# EAGLE board MainBoard (EAGLE 9.1.3)
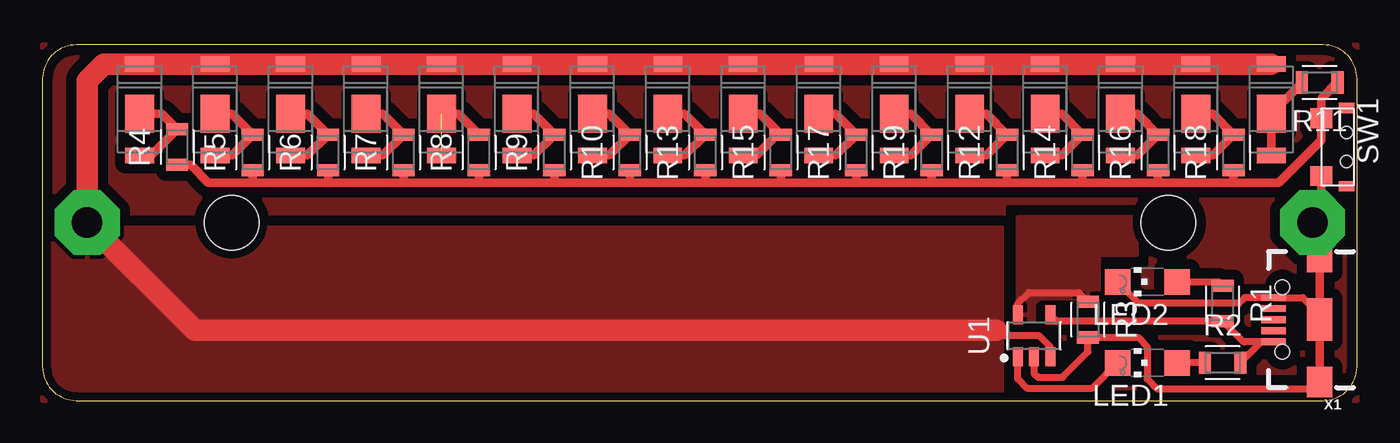
[diagram p0: board, top side]
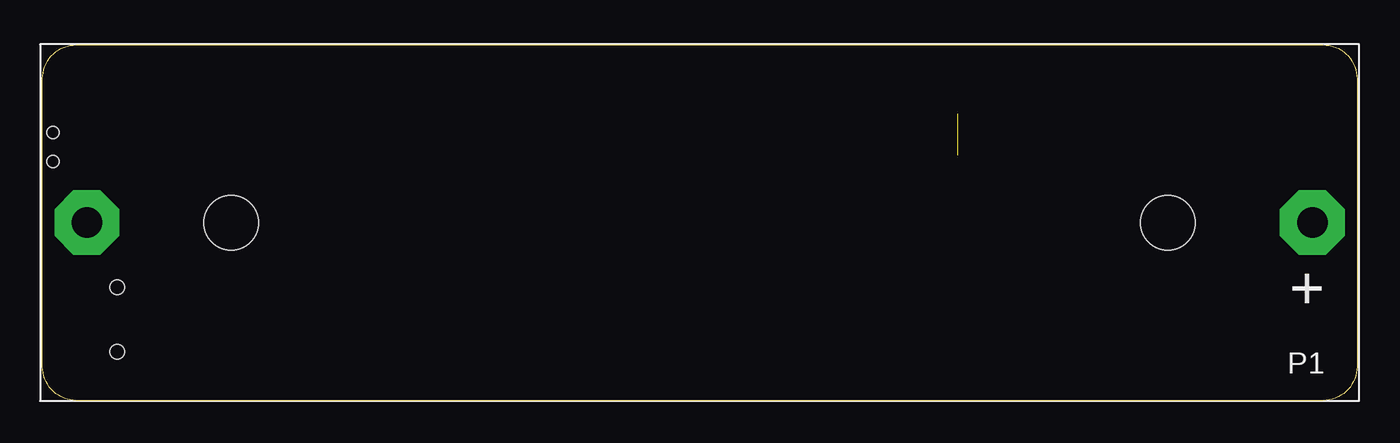
[diagram p1: board, bottom side, seen from below]

Size 77.45 x 20.94 mm. Coordinates in mm from the lower left corner, seen from the top.
Outline: 75.45,20.94 2,20.94 arc90 0,18.94 0,2 arc90 2,0 75.45,0 arc90 77.45,2 77.45,18.94 arc90 75.45,20.94
Copper layers (1*16): Top 0.035mm / dielectric 1.5mm / Bottom 0.035mm
Design rules "EagleDesignRules": minimum track width 0.25mm, minimum drill 0.3mm, track to track 0.25mm, track to pad 0.25mm, pad to pad 0.25mm, via to via 0.25mm, smd to smd 0.25mm, copper to edge 0.5mm, drill to drill 0.5mm, minimum pad ring 10mil, minimum via ring 8mil, stop-mask expansion 4mil, vias tented up to drill 0mil, thermal gap 0.25mm

## Footprints (pad centres in the part's own frame; a part is rotated, then mirrored left to right if it is on the bottom)
LED1206 = smd 1.5 x 1.5: A 0,-1.75; C 0,1.75
LED5730 = smd 0.9 x 1.7: A -2.708,-0.014; C 2.672,-0.014 | smd 2.25 x 1.7: A1 -0.263,-0.014
18650X1_HOLDER = drill 1.8 pad 3.81 octagon: + -36.1,0; - 36.1,0 | hole 3.2: -27.6,0; 27.6,0
RESC2012X50 = smd 0.712 x 1.312: 1 -1.05,0; 2 1.05,0
SW-2X4-SIDE = smd 1.15 x 1.3: 1 -1.7,-1.5; 2 1.7,-1.5 | smd 0.6 x 0.9: 3 2.3,0; 4 -2.3,0 | hole 0.7: -0.85,0; 0.85,0
SOT95P280X145-5 = smd 1.127 x 0.589: 1 -1.242,0.95; 2 -1.242,0; 3 -1.242,-0.95; 4 1.242,-0.95; 5 1.242,0.95
USB-B-MICRO-SMD = smd 1.45 x 0.4: D+ 2.725,0; D- 2.725,0.65; GND 2.725,-1.3; ID 2.725,-0.65; VBUS 2.725,1.3 | smd 1.5 x 1.8: SHIELD1 0,3.685; SHIELD2 0,-3.685 | smd 1.5 x 2.5: SHIELD3 0,0 | hole 0.85: 2.2,1.9; 2.2,-1.9

## Placement (x,y rotation side)
LED1  RED  [LED1206]  65.09,2.22 90 top
LED2  GREEN  [LED1206]  65.09,6.99 90 top
LED3  LED_5630  [LED5730]  5.71,17.14 90 top
LED4  LED_5630  [LED5730]  10.16,17.14 90 top
LED5  LED_5630  [LED5730]  14.6,17.14 90 top
LED6  LED_5630  [LED5730]  19.05,17.14 90 top
LED7  LED_5630  [LED5730]  23.49,17.14 90 top
LED8  LED_5630  [LED5730]  27.94,17.14 90 top
LED9  LED_5630  [LED5730]  32.38,17.14 90 top
LED10  LED_5630  [LED5730]  72.39,17.14 90 top
LED11  LED_5630  [LED5730]  54.61,17.14 90 top
LED12  LED_5630  [LED5730]  36.83,17.14 90 top
LED13  LED_5630  [LED5730]  59.05,17.14 90 top
LED14  LED_5630  [LED5730]  41.27,17.14 90 top
LED15  LED_5630  [LED5730]  63.5,17.14 90 top
LED16  LED_5630  [LED5730]  45.72,17.14 90 top
LED17  LED_5630  [LED5730]  67.94,17.14 90 top
LED18  LED_5630  [LED5730]  50.16,17.14 90 top
P1  BATTERY18650X1  [18650X1_HOLDER]  38.73,10.48 180 bottom
R1  2K  [RESC2012X50]  69.53,5.71 270 top
R2  2K  [RESC2012X50]  69.53,2.22 0 top
R3  2K7  [RESC2012X50]  61.59,4.76 270 top
R4  20R  [RESC2012X50]  7.94,14.92 90 top
R5  20R  [RESC2012X50]  12.38,14.61 90 top
R6  20R  [RESC2012X50]  16.83,14.61 90 top
R7  20R  [RESC2012X50]  21.27,14.61 90 top
R8  20R  [RESC2012X50]  25.72,14.61 90 top
R9  20R  [RESC2012X50]  30.16,14.61 90 top
R10  20R  [RESC2012X50]  34.61,14.61 90 top
R11  20R  [RESC2012X50]  75.25,18.73 180 top
R12  20R  [RESC2012X50]  56.83,14.61 90 top
R13  20R  [RESC2012X50]  39.05,14.61 90 top
R14  20R  [RESC2012X50]  61.28,14.61 90 top
R15  20R  [RESC2012X50]  43.5,14.61 90 top
R16  20R  [RESC2012X50]  65.72,14.61 90 top
R17  20R  [RESC2012X50]  47.94,14.61 90 top
R18  20R  [RESC2012X50]  70.17,14.61 90 top
R19  20R  [RESC2012X50]  52.39,14.61 90 top
SW1  BUTTON2X4-SIDE  [SW-2X4-SIDE]  76.83,14.92 270 top
U1  POWER-STC4054  [SOT95P280X145-5]  58.42,3.81 90 top
X1  USB-MINIMICROMICRO  [USB-B-MICRO-SMD]  75.25,4.76 180 top

## Library data of the parts
LED1-LED18 P1 R1-R19 SW1 U1 X1 = Flamberm

## Nets
+5V: R1.2 R2.2 U1.4 X1.VBUS
GND: LED2.C P1.- R3.2 SW1.2 U1.2 X1.GND X1.SHIELD1 X1.SHIELD2 X1.SHIELD3
N$1: LED1.C U1.1
N$2: LED1.A R2.1
N$3: LED2.A R1.1
N$4: LED3.C LED4.C LED5.C LED6.C LED7.C LED8.C LED9.C LED10.C LED11.C LED12.C LED13.C LED14.C LED15.C LED16.C LED17.C LED18.C P1.+ U1.3
N$5: R3.1 U1.5
N$6: LED3.A LED3.A1 R4.2
N$7: R4.1 R5.1 R6.1 R7.1 R8.1 R9.1 R10.1 R11.1 R12.1 R13.1 R14.1 R15.1 R16.1 R17.1 R18.1 R19.1 SW1.1
N$9: LED4.A LED4.A1 R5.2
N$10: LED11.A LED11.A1 R12.2
N$12: LED5.A LED5.A1 R6.2
N$13: LED12.A LED12.A1 R13.2
N$14: LED13.A LED13.A1 R14.2
N$15: LED6.A LED6.A1 R7.2
N$16: LED14.A LED14.A1 R15.2
N$17: LED15.A LED15.A1 R16.2
N$18: LED7.A LED7.A1 R8.2
N$19: LED16.A LED16.A1 R17.2
N$20: LED17.A LED17.A1 R18.2
N$21: LED8.A LED8.A1 R9.2
N$22: LED18.A LED18.A1 R19.2
N$24: LED9.A LED9.A1 R10.2
N$27: LED10.A LED10.A1 R11.2

## Tracks (layer width: path | path; a pad name or v marks a point on that pad's centre or on a via)
+5V
  Top 0.406: X1.VBUS 71.82,3.46 | 71.82,3.46 R2.2 | U1.4 59.76,4.67 R1.2 70.73,3.46 70.87,3.46 71.82,3.46
GND
  Top 0.406: LED2.C 64.61,5.71 70.48,5.71 70.83,6.06 X1.GND 74.27,6.06 75.25,5.08 | X1.SHIELD2 75.25,8.26 | 75.25,8.26 75.25,5.08 | 75.25,5.08 X1.SHIELD3 | X1.SHIELD1 74.87,0.7 65.65,0.7 65.09,1.27 65.09,3.17 64.55,3.71 R3.2 61.59,2.86 60.1,1.36 58.65,1.36 58.42,1.59 U1.2 | 75.25,10.06 75.25,9.84 75.25,8.57 75.25,8.26
  Top 0.508: SW1.2 75.33,10.98 P1.- 75.25,10.06 75.25,9.84 | X1.SHIELD1 X1.SHIELD3 75.25,8.57
N$1
  Top 0.406: LED1.C 61.82,0.7 58.03,0.7 57.47,1.27 U1.1
N$2
  Top 0.406: R2.1 LED1.A
N$3
  Top 0.406: LED2.A 69.31,6.99 R1.1
N$4
  Top 0.406: U1.3 59.37,3.18 58.74,3.81 56.52,3.81 56.2,4.13
  Top 0.508: LED12.C | LED14.C 41.59,19.82 | LED16.C 46.04,19.82 | LED18.C 50.16,19.82 | LED11.C | LED13.C 59.05,19.82 | LED15.C | LED17.C 67.63,19.82
  Top 1.27: 56.2,4.13 8.98,4.13 P1.+ 2.63,18.83 3.62,19.81 | 3.62,19.81 3.81,19.81 | 3.62,19.81 3.62,19.82 LED3.C LED4.C LED5.C LED6.C LED7.C LED8.C LED9.C LED12.C 41.59,19.82 46.04,19.82 50.16,19.82 LED11.C 56.83,19.82 59.05,19.82 LED15.C 67.63,19.82 LED10.C
  pour Top: 0,10.16 56.52,10.16 56.52,0 0,0 0,9.84 -0.32,10.16
N$5
  Top 0.406: U1.5 57.47,5.72 58.1,6.35 61.06,6.35 R3.1
  pour Top: 57.47,4.76 57.47,10.79 64.45,10.79 64.45,8.57 62.23,8.57 62.23,6.03 58.74,6.03 58.42,5.71 58.42,4.76
N$6
  Top 0.508: LED3.A 6.4,14.44 R4.2 7.03,16.88 LED3.A1
N$7
  Top 0.508: R4.1 8.73,13.87 9.77,12.83 12.38,12.83 | 12.38,12.83 16.83,12.83 | 16.83,12.83 21.27,12.83 | 21.27,12.83 25.72,12.83 | 25.72,12.83 30.16,12.83 | 30.16,12.83 34.61,12.83 | 34.61,12.83 39.05,12.83 | 39.05,12.83 43.5,12.83 | 43.5,12.83 47.94,12.83 | 47.94,12.83 52.39,12.83 | 52.39,12.83 56.83,12.83 | 56.83,12.83 61.28,12.83 | 61.28,12.83 65.72,12.83 | 65.72,12.83 70.17,12.83 | 70.17,12.83 72.84,12.83 75.33,15.33 SW1.1 75.33,17.77 R11.1 | R18.1 70.17,12.83 | R16.1 65.72,12.83 | R14.1 61.28,12.83 | R12.1 56.83,12.83 | R19.1 52.39,12.83 | R17.1 47.94,12.83 | R15.1 43.5,12.83 | R13.1 39.05,12.83 | R10.1 34.61,12.83 | R9.1 30.16,12.83 | R8.1 25.72,12.83 | R7.1 21.27,12.83 | R6.1 16.83,12.83 | R5.1 12.38,12.83
N$8
  pour Top (isolate 0.61, rank 6): 0,0 0,20.94 77.45,20.94 77.45,0
N$9
  Top 0.508: LED4.A1 11.15,16.88 R5.2 11.16,14.44 LED4.A
N$10
  Top 0.508: LED11.A1 55.6,16.88 R12.2 55.61,14.44 LED11.A
N$12
  Top 0.508: LED5.A1 15.6,16.88 R6.2 15.61,14.44 LED5.A
N$13
  Top 0.508: LED12.A1 37.83,16.88 R13.2 37.83,14.44 LED12.A
N$14
  Top 0.508: LED13.A1 60.05,16.88 R14.2 60.06,14.44 LED13.A
N$15
  Top 0.508: LED6.A1 20.05,16.88 R7.2 20.05,14.44 LED6.A
N$16
  Top 0.508: LED14.A1 42.27,16.88 43.39,15.77 | 43.39,15.77 R15.2 | LED14.A 42.06,14.44 43.39,15.77
N$17
  Top 0.508: LED15.A1 64.5,16.88 R16.2 64.5,14.44 LED15.A
N$18  (1 unrouted)
  Top 0.508: LED7.A1 24.49,16.88 R8.2
N$19
  Top 0.508: LED16.A1 46.72,16.88 R17.2 46.72,14.44 LED16.A
N$20
  Top 0.508: LED17.A1 68.94,16.88 R18.2 68.95,14.44 LED17.A
N$21
  Top 0.508: LED8.A1 28.94,16.88 R9.2 28.95,14.44 LED8.A
N$22
  Top 0.508: LED18.A1 51.16,16.88 R19.2 51.17,14.44 LED18.A
N$24
  Top 0.508: LED9.A1 33.38,16.88 R10.2 33.39,14.44 LED9.A
N$27
  Top 0.508: R11.2 74.2,18.68 LED10.A1 LED10.A